# Allegro board dev-template-board.brd
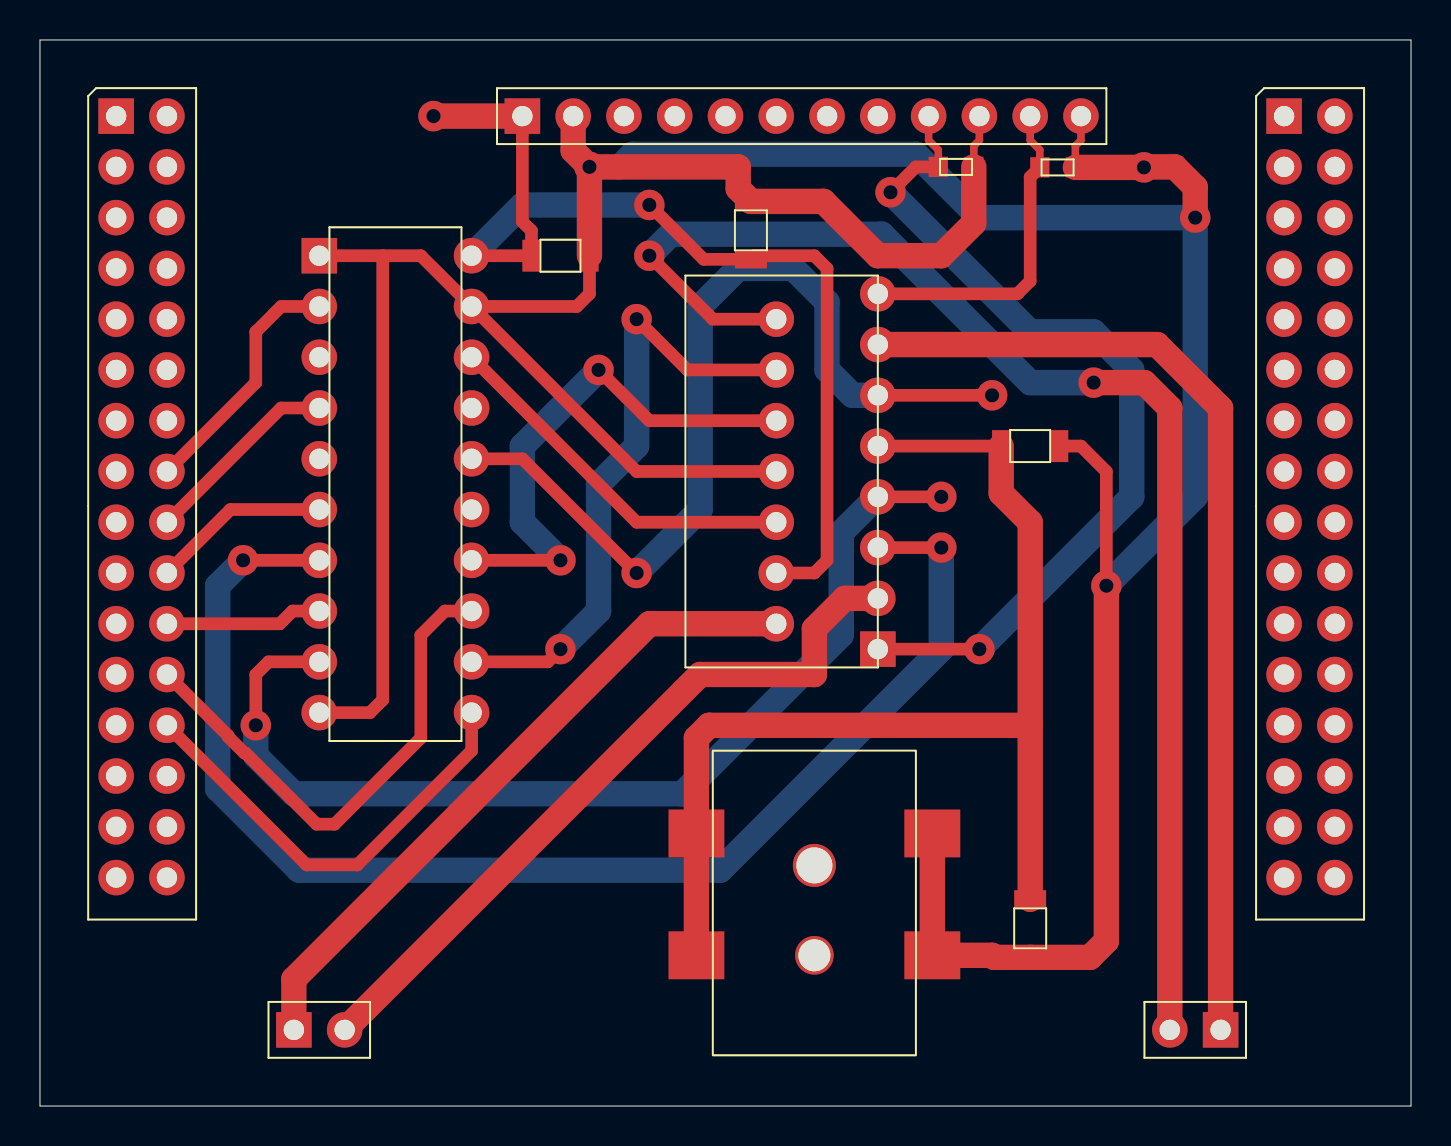
[diagram p0: board, top side]
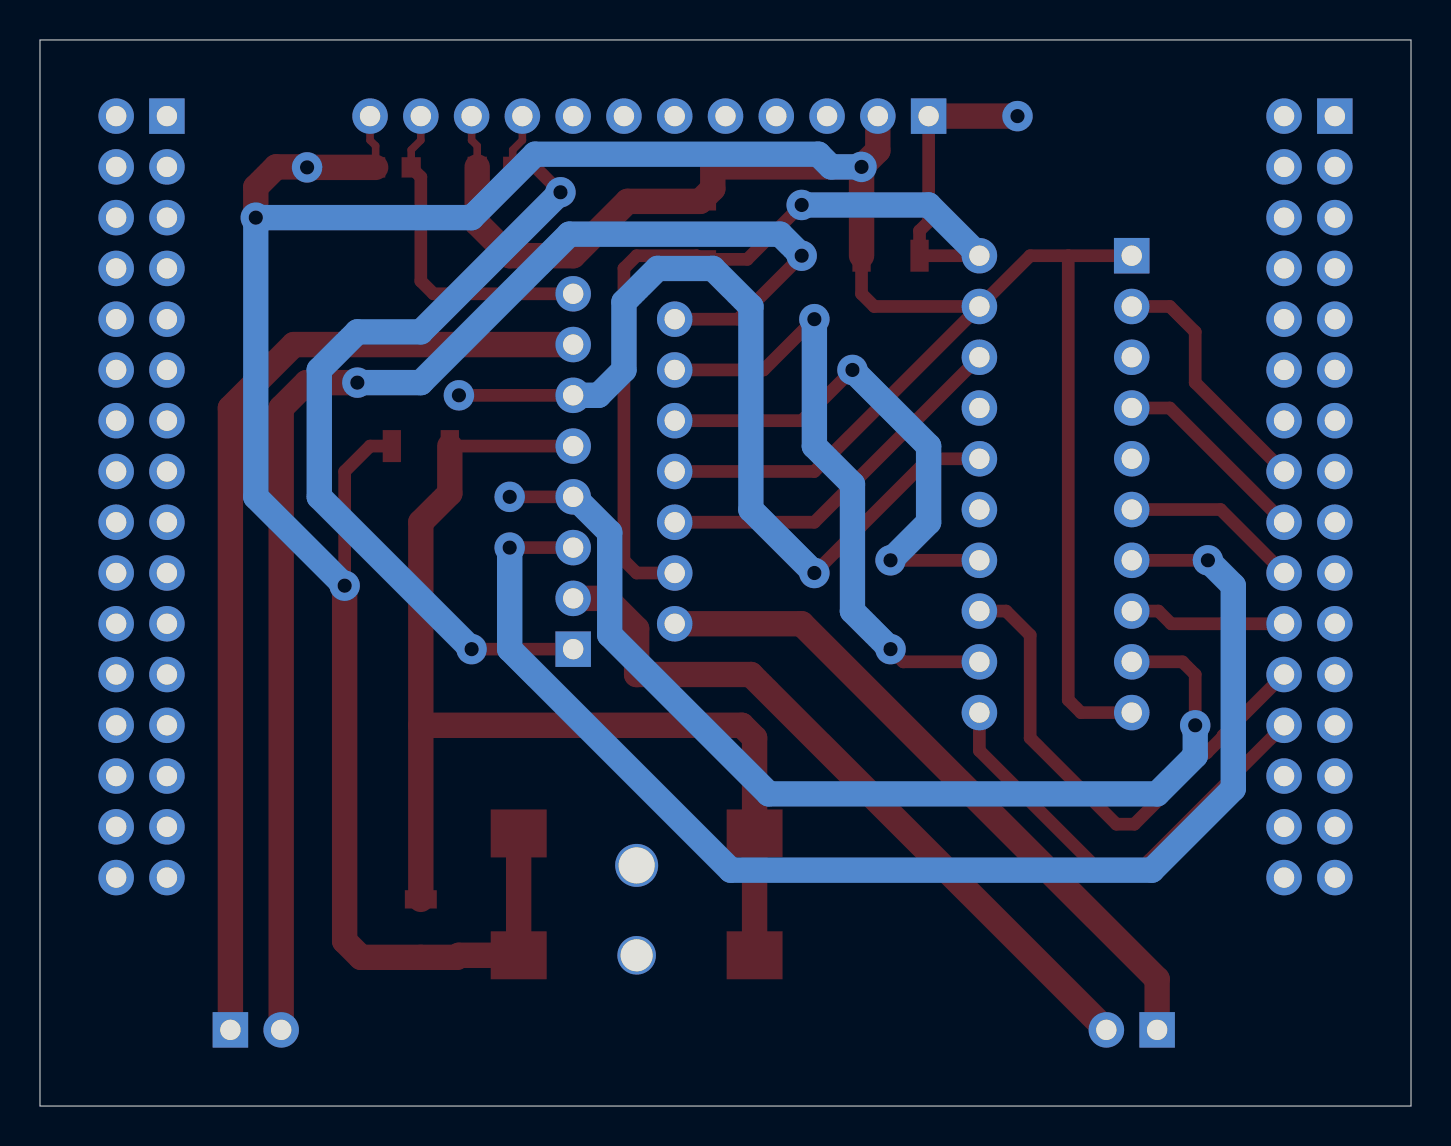
[diagram p1: board, bottom side, seen from below]

Outline 68.58 x 53.34 mm; copper layers: TOP, BOTTOM. Coordinates in mm from the lower left corner of the outline.

## Placement (name value [footprint] x y rotation side)
C1  10u  [C1206]  49.53 8.89 90 top
C2  0.1u  [C1206]  35.56 43.81 90 top
C3  0.1u  [C1206]  49.53 33.02 180 top
C4  0.1u  [C1206]  26.04 42.55 180 top
J1  CON12  [CON12_MIL]  24.13 49.53 90 top
J2  2mm  [PWRPLUG]  38.73 2.54 90 top
J3  CON32A  [CON32A_MIL]  3.81 49.53 0 top
J4  CON32A  [CON32A_MIL]  62.23 49.53 0 top
J5  CON2  [CON2AP_MIL]  12.7 3.81 90 top
J6  CON2  [CON2AP_MIL]  59.05 3.81 270 top
NOREF  -  []  0 0 0 top
R1  750  [R0603]  45.82 46.99 180 top
R2  750  [R0603]  50.9 46.96 180 top
U1  SN74ALS244  [DIP20]  17.78 31.11 0 top
U2  L298N  [MULTIWATT15]  39.37 31.75 180 top

## Library data of the parts
C1-C4 = C
J1 = CON12
J2 = PwrPlug_2
J3 J4 = CON32A
J5 J6 = CON2
R1 R2 = R
U1 = SN74ALS244
U2 = L298N_1

## Footprints (pads in the part's own frame, mm; a bottom-side part is the same pattern mirrored in y, then rotated)
C1206
  rect 0.914x1.6 smd: 1(-1.45,0) 2(1.45,0)
CON2AP_MIL
  rect 1.778x1.778 hole 1.016: 1(0,0)
  round 1.778 hole 1.016: 2(0,-2.54)
CON12_MIL
  rect 1.778x1.778 hole 1.016: 1(0,0)
  round 1.778 hole 1.016: 2(0,-2.54) 3(0,-5.08) 4(0,-7.62) 5(0,-10.16) 6(0,-12.7) 7(0,-15.24) 8(0,-17.78) 9(0,-20.32) 10(0,-22.86) 11(0,-25.4) 12(0,-27.94)
CON32A_MIL
  rect 1.778x1.778 hole 1.016: 1(0,0)
  round 1.778 hole 1.016: 2(2.54,0) 3(0,-2.54) 4(2.54,-2.54) 5(0,-5.08) 6(2.54,-5.08) 7(0,-7.62) 8(2.54,-7.62) 9(0,-10.16) 10(2.54,-10.16) 11(0,-12.7) 12(2.54,-12.7) 13(0,-15.24) 14(2.54,-15.24) 15(0,-17.78) 16(2.54,-17.78) 17(0,-20.32) 18(2.54,-20.32) 19(0,-22.86) 20(2.54,-22.86) 21(0,-25.4) 22(2.54,-25.4) 23(0,-27.94) 24(2.54,-27.94) 25(0,-30.48) 26(2.54,-30.48) 27(0,-33.02) 28(2.54,-33.02) 29(0,-35.56) 30(2.54,-35.56) 31(0,-38.1) 32(2.54,-38.1)
DIP20
  rect 1.778x1.778 hole 1.016: 1(-3.81,11.43)
  round 1.778 hole 1.016: 2(-3.81,8.89) 3(-3.81,6.35) 4(-3.81,3.81) 5(-3.81,1.27) 6(-3.81,-1.27) 7(-3.81,-3.81) 8(-3.81,-6.35) 9(-3.81,-8.89) 10(-3.81,-11.43) 11(3.81,-11.43) 12(3.81,-8.89) 13(3.81,-6.35) 14(3.81,-3.81) 15(3.81,-1.27) 16(3.81,1.27) 17(3.81,3.81) 18(3.81,6.35) 19(3.81,8.89) 20(3.81,11.43)
MULTIWATT15
  rect 1.778x1.778 hole 1.016: 1(-2.54,8.89)
  round 1.778 hole 1.016: 2(2.54,7.62) 3(-2.54,6.35) 4(2.54,5.08) 5(-2.54,3.81) 6(2.54,2.54) 7(-2.54,1.27) 8(2.54,0) 9(-2.54,-1.27) 10(2.54,-2.54) 11(-2.54,-3.81) 12(2.54,-5.08) 13(-2.54,-6.35) 14(2.54,-7.62) 15(-2.54,-8.89)
PWRPLUG
  round 1.93 hole 1.6: (5.001,0)
  round 2.151 hole 1.801: (9.5,0)
  rect 2.4x2.799 smd: 1(5.001,5.9) 2(5.001,-5.9) 3(11.1,-5.9) 4(11.1,5.9)
R0603
  rect 0.965x1.016 smd: 1(-0.889,0) 2(0.889,0)

## Nets
5V: C2.1 C4.2 J1.1 U1.20(VCC) U2.4(VS)
GND: C1.1 C2.2 C3.1 C4.1 J1.2 J1.10 J1.12 J2.2 J2.3 R1.1 R2.1 U1.1(1O\E\) U1.10(GND) U1.19(1O\E\) U2.8(GND)
VDRIVE: C1.2 C3.2 J2.1 J2.4 U2.9(VSS)
N03318: J5.1 U2.2(OUT1)
N03343: J6.1 U2.13(OUT3)
N03452: U1.9(Y) U2.7(INPUT 2)
N07527: J6.2 U2.14(OUT4)
N08223: U1.7(Y) U2.5(INPUT 1)
N08245: U1.14(Y) U2.10(INPUT 3)
N08269: U1.18(Y) U2.6(ENABLE A)
N08336: U1.16(Y) U2.11(ENABLE B)
N08455: J5.2 U2.3(OUT2)
N08467: J3.18 U1.4(A)
N08477: J3.16 U1.2(A)
N09789: J1.11 R2.2 U2.15(SENB)
N10044: J1.9 R1.2 U2.1(SENA)
N11996: J3.20 U1.6(A)
N12003: J3.22 U1.8(A)
N12010: J3.24 U1.13(A)
N12017: J3.26 U1.11(A)
N12735: U1.12(Y) U2.12(INPUT 4)

Pads without a net: J1 3 4 5 6 7 8; J3 1 2 3 4 5 6 7 8 9 10 11 12 13 14 15 17 19 21 23 25 27 28 29 30 31 32; J4 1 2 3 4 5 6 7 8 9 10 11 12 13 14 15 16 17 18 19 20 21 22 23 24 25 26 27 28 29 30 31 32; U1 3 5 15 17

## Via types
v1: diameter 1.524, hole 0.711, TOP to BOTTOM, 20 vias

## Routing (per net, layer and track width the routed paths; a pad name or vN(x,y) marks a point on that pad's centre or on a via; arc(x,y) is an arc through that point)
5V: length 52.3
  TOP w0.635: J1.1 24.13,44.25 24.58,43.79 C4.2 U1.20 ; U2.4 38.73,26.67 39.37,27.3 39.37,41.91 38.73,42.55 35.74,42.55 C2.1 33.2,42.36 v1(30.48,45.09)
  TOP w1.27: J1.1 v1(19.68,49.53)
  BOTTOM w1.27: v1(30.48,45.09) 24.13,45.09 U1.20
GND: length 200.9
  TOP w0.381: J1.10 46.99,48.32 46.71,48.04 R1.1 ; J1.12 52.07,48.32 51.79,48.04 R2.1
  TOP w0.635: v1(53.34,26.04) 53.34,31.75 52.07,33.02 C3.1 ; U1.10 16.51,19.68 17.14,20.32 17.14,42.55 ; 17.14,42.55 19.05,42.55 U1.19 ; 17.14,42.55 U1.1 ; U2.8 29.84,31.75 U1.19 ; C4.1 27.49,40.64 26.85,40.01 U1.19 ; C2.2 35.22,45.27
  TOP w1.27: v1(27.49,46.99) 34.92,46.99 34.92,45.9 C2.2 39.19,45.27 41.91,42.55 45.09,42.55 46.71,44.17 R1.1 ; v1(27.49,46.99) C4.1 ; v1(27.49,46.99) 26.67,47.81 J1.2 ; v1(57.78,44.45) 57.78,45.97 56.77,46.99 55.24,46.99 v1(55.22,46.96) R2.1 ; v1(53.34,26.04) 53.34,8.26 52.52,7.44 C1.1 47.73,7.44 47.62,7.54 J2.2 J2.3
  BOTTOM w1.27: v1(27.49,46.99) 29.01,46.99 29.64,47.62 43.81,47.62 46.99,44.45 v1(57.78,44.45) 57.78,30.48 v1(53.34,26.04)
VDRIVE: length 57.3
  TOP w0.635: U2.9 C3.2
  TOP w1.27: C3.2 48.08,30.66 49.53,29.21 49.53,19.05 ; 49.53,19.05 C1.2 ; 49.53,19.05 33.47,19.05 32.83,18.41 J2.4 J2.1
N03318: length 34
  TOP w1.27: U2.2 30.48,24.13 12.7,6.35 J5.1
N03343: length 49.6
  TOP w1.27: U2.13 55.88,38.1 59.05,34.92 J6.1
N03452: length 51.7
  TOP w0.635: v1(10.79,19.05) 10.79,21.59 11.43,22.23 U1.9 ; U2.7 v1(45.09,30.48)
  BOTTOM w1.27: v1(10.79,19.05) 10.79,17.53 12.7,15.62 32.13,15.62 40.08,23.57 40.08,28.7 41.86,30.48 U2.7
N07527: length 68.9
  TOP w0.635: v1(30.48,42.55) 33.66,39.37 U2.14
  TOP w1.27: J6.2 56.52,34.92 55.24,36.2 v1(52.7,36.2)
  BOTTOM w1.27: v1(52.7,36.2) 49.53,36.2 42.1,43.62 31.56,43.62 v1(30.48,42.55)
N08223: length 66.5
  TOP w0.635: U1.7 v1(10.16,27.3) ; U2.5 v1(45.09,27.94)
  BOTTOM w1.27: v1(45.09,27.94) 45.09,22.86 34.03,11.8 12.96,11.8 8.89,15.88 8.89,26.04 v1(10.16,27.3)
N08245: length 26.3
  TOP w0.635: U1.14 v1(26.04,27.3) ; v1(27.94,36.83) 30.48,34.29 U2.10
  BOTTOM w1.27: v1(26.04,27.3) 24.13,29.21 24.13,33.02 v1(27.94,36.83)
N08269: length 18.7
  TOP w0.635: U1.18 29.84,29.21 U2.6
N08336: length 45.3
  TOP w0.635: v1(29.84,26.67) 24.13,32.38 U1.16 ; U2.11 v1(47.62,35.56)
  BOTTOM w1.27: U2.11 40.64,35.56 39.37,36.83 39.37,40.22 37.68,41.91 34.92,41.91 33.02,40.01 33.02,29.84 v1(29.84,26.67)
N08455: length 37
  TOP w1.27: U2.3 40.26,25.4 38.73,23.88 38.73,21.59 33.02,21.59 J5.2
N08467: length 10
  TOP w0.635: U1.4 12.06,34.92 J3.18
N08477: length 12.5
  TOP w0.635: U1.2 12.06,40.01 10.79,38.73 10.79,36.2 J3.16
N09789: length 16.5
  TOP w0.381: R2.2 50.01,47.84 49.53,48.32 J1.11
  TOP w0.635: R2.2 49.53,46.48 49.53,41.27 48.9,40.64 U2.15
N10044: length 43.6
  TOP w0.381: R1.2 44.93,47.84 44.45,48.32 J1.9
  TOP w0.635: R1.2 43.81,46.99 v1(42.55,45.72) ; U2.1 v1(46.99,22.86)
  BOTTOM w1.27: v1(46.99,22.86) 54.61,30.48 54.61,36.83 52.7,38.73 49.53,38.73 v1(42.55,45.72)
N11996: length 8.9
  TOP w0.635: U1.6 9.53,29.84 J3.20
N12003: length 7.9
  TOP w0.635: J3.22 12,24.13 12.63,24.77 U1.8
N12010: length 25.8
  TOP w0.635: U1.13 20.25,24.77 19.05,23.56 19.05,18.41 14.74,14.1 13.84,14.1 10.27,17.67 10.22,17.67 9.41,18.48 9.41,18.53 J3.24
N12017: length 22.4
  TOP w0.635: J3.26 13.34,12.06 15.88,12.06 21.59,17.78 U1.11
N12735: length 30.8
  TOP w0.635: v1(26.04,22.86) 25.4,22.23 U1.12 ; v1(29.84,39.37) 32.38,36.83 U2.12
  BOTTOM w1.27: v1(29.84,39.37) 29.84,33.02 27.94,31.11 27.94,24.77 v1(26.04,22.86)
